# Altium PCB PCB_Tapa.PcbDoc
Units mil, origin at the board's own origin, x right, y up, seen from the top; angles counter-clockwise.
Board outline 2283.46 x 2283.46 mil, 2 copper layers (Top Layer, Bottom Layer), stack 65.792 mil thick; 56 components, 45 nets, 167 pads, 17 vias.
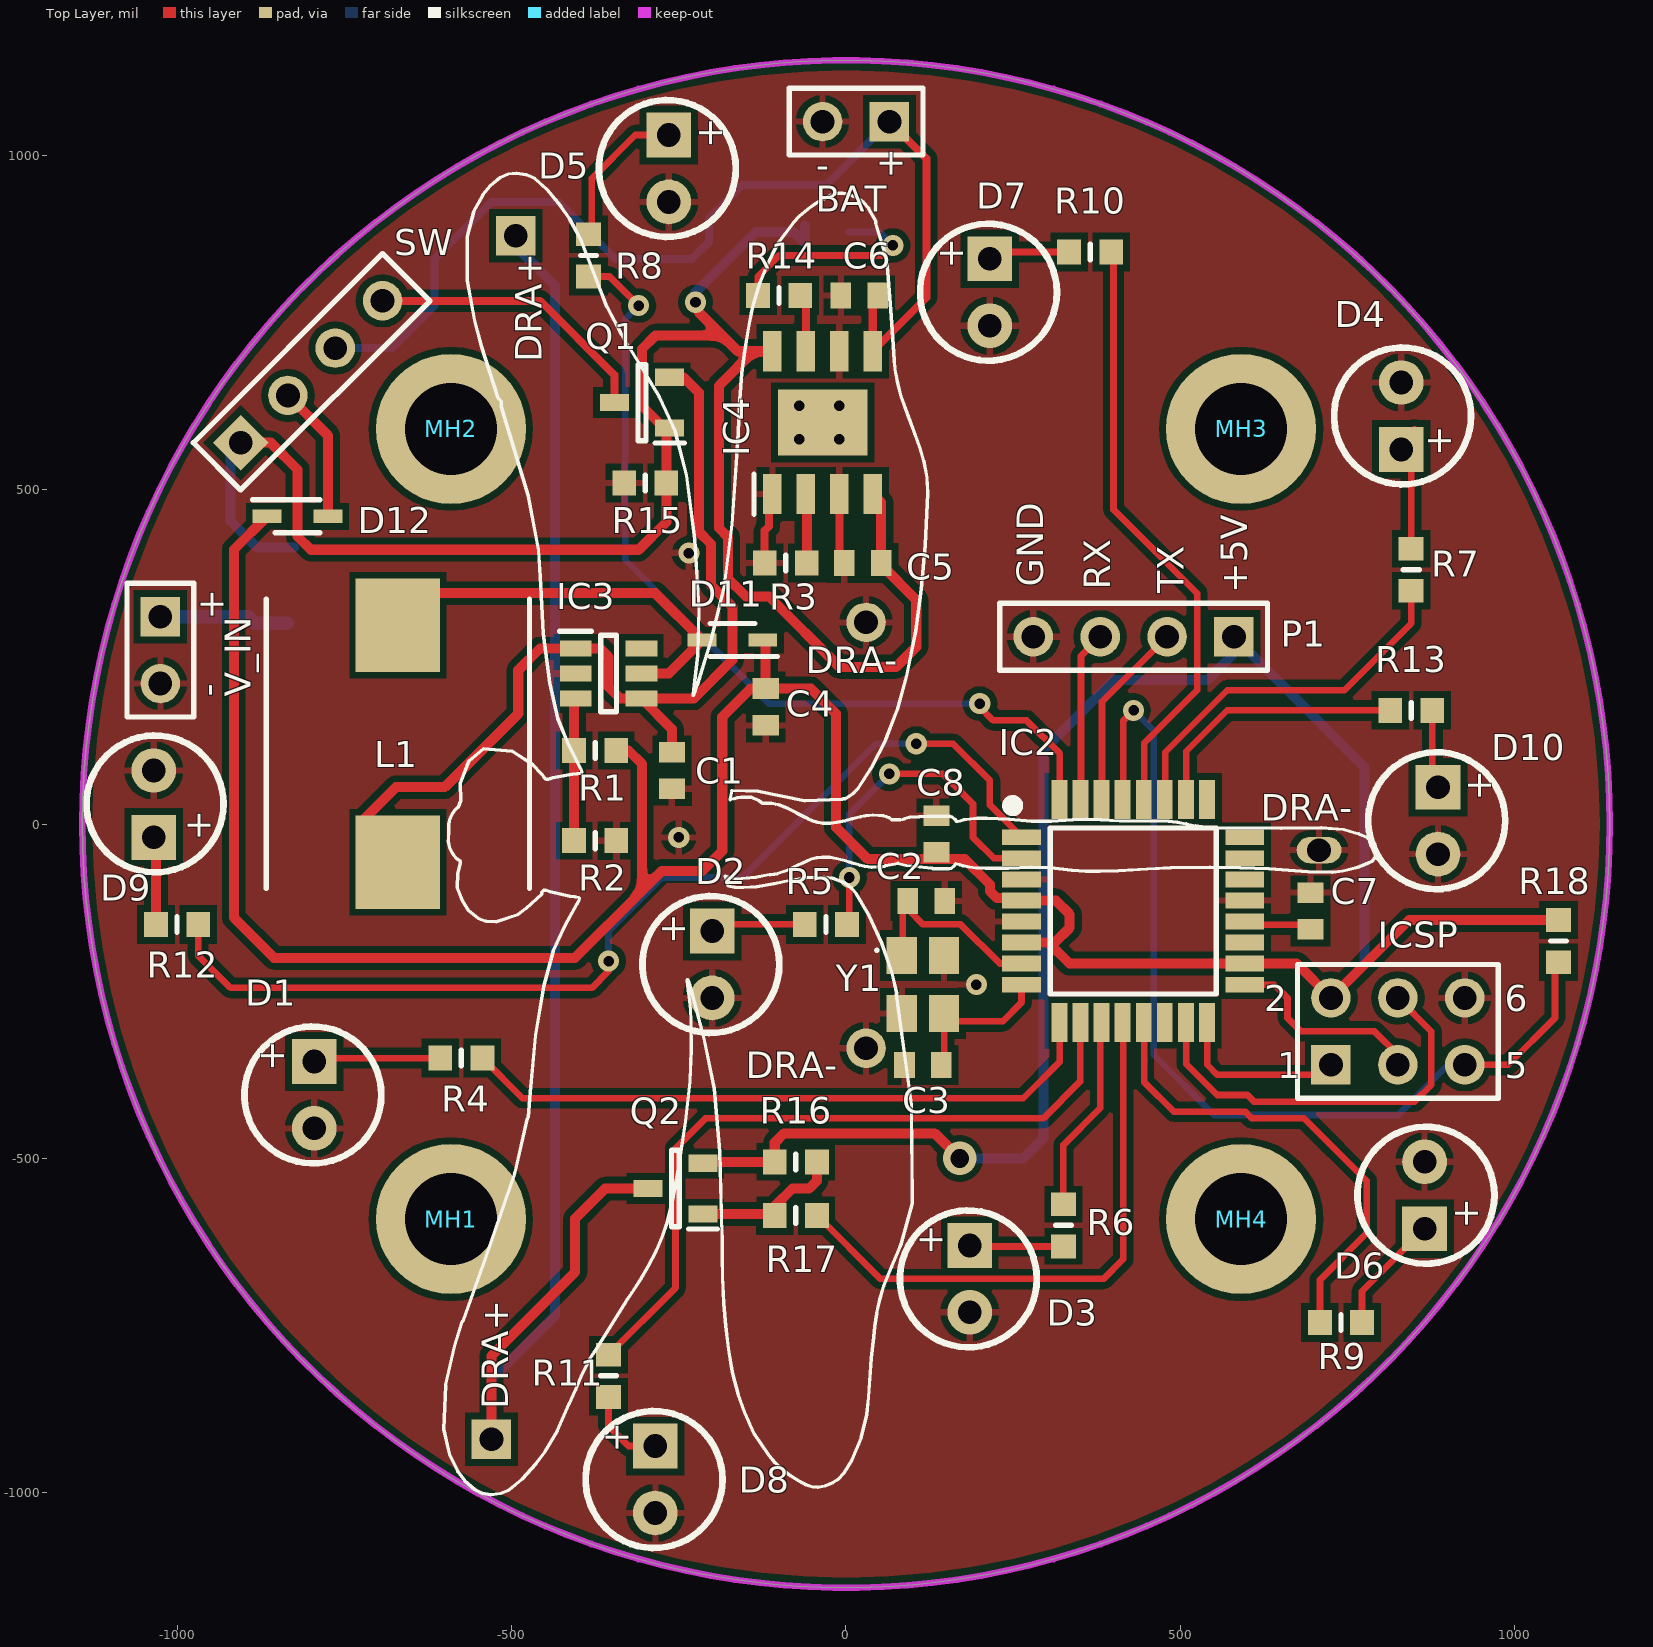
[diagram p0: Top Layer view]
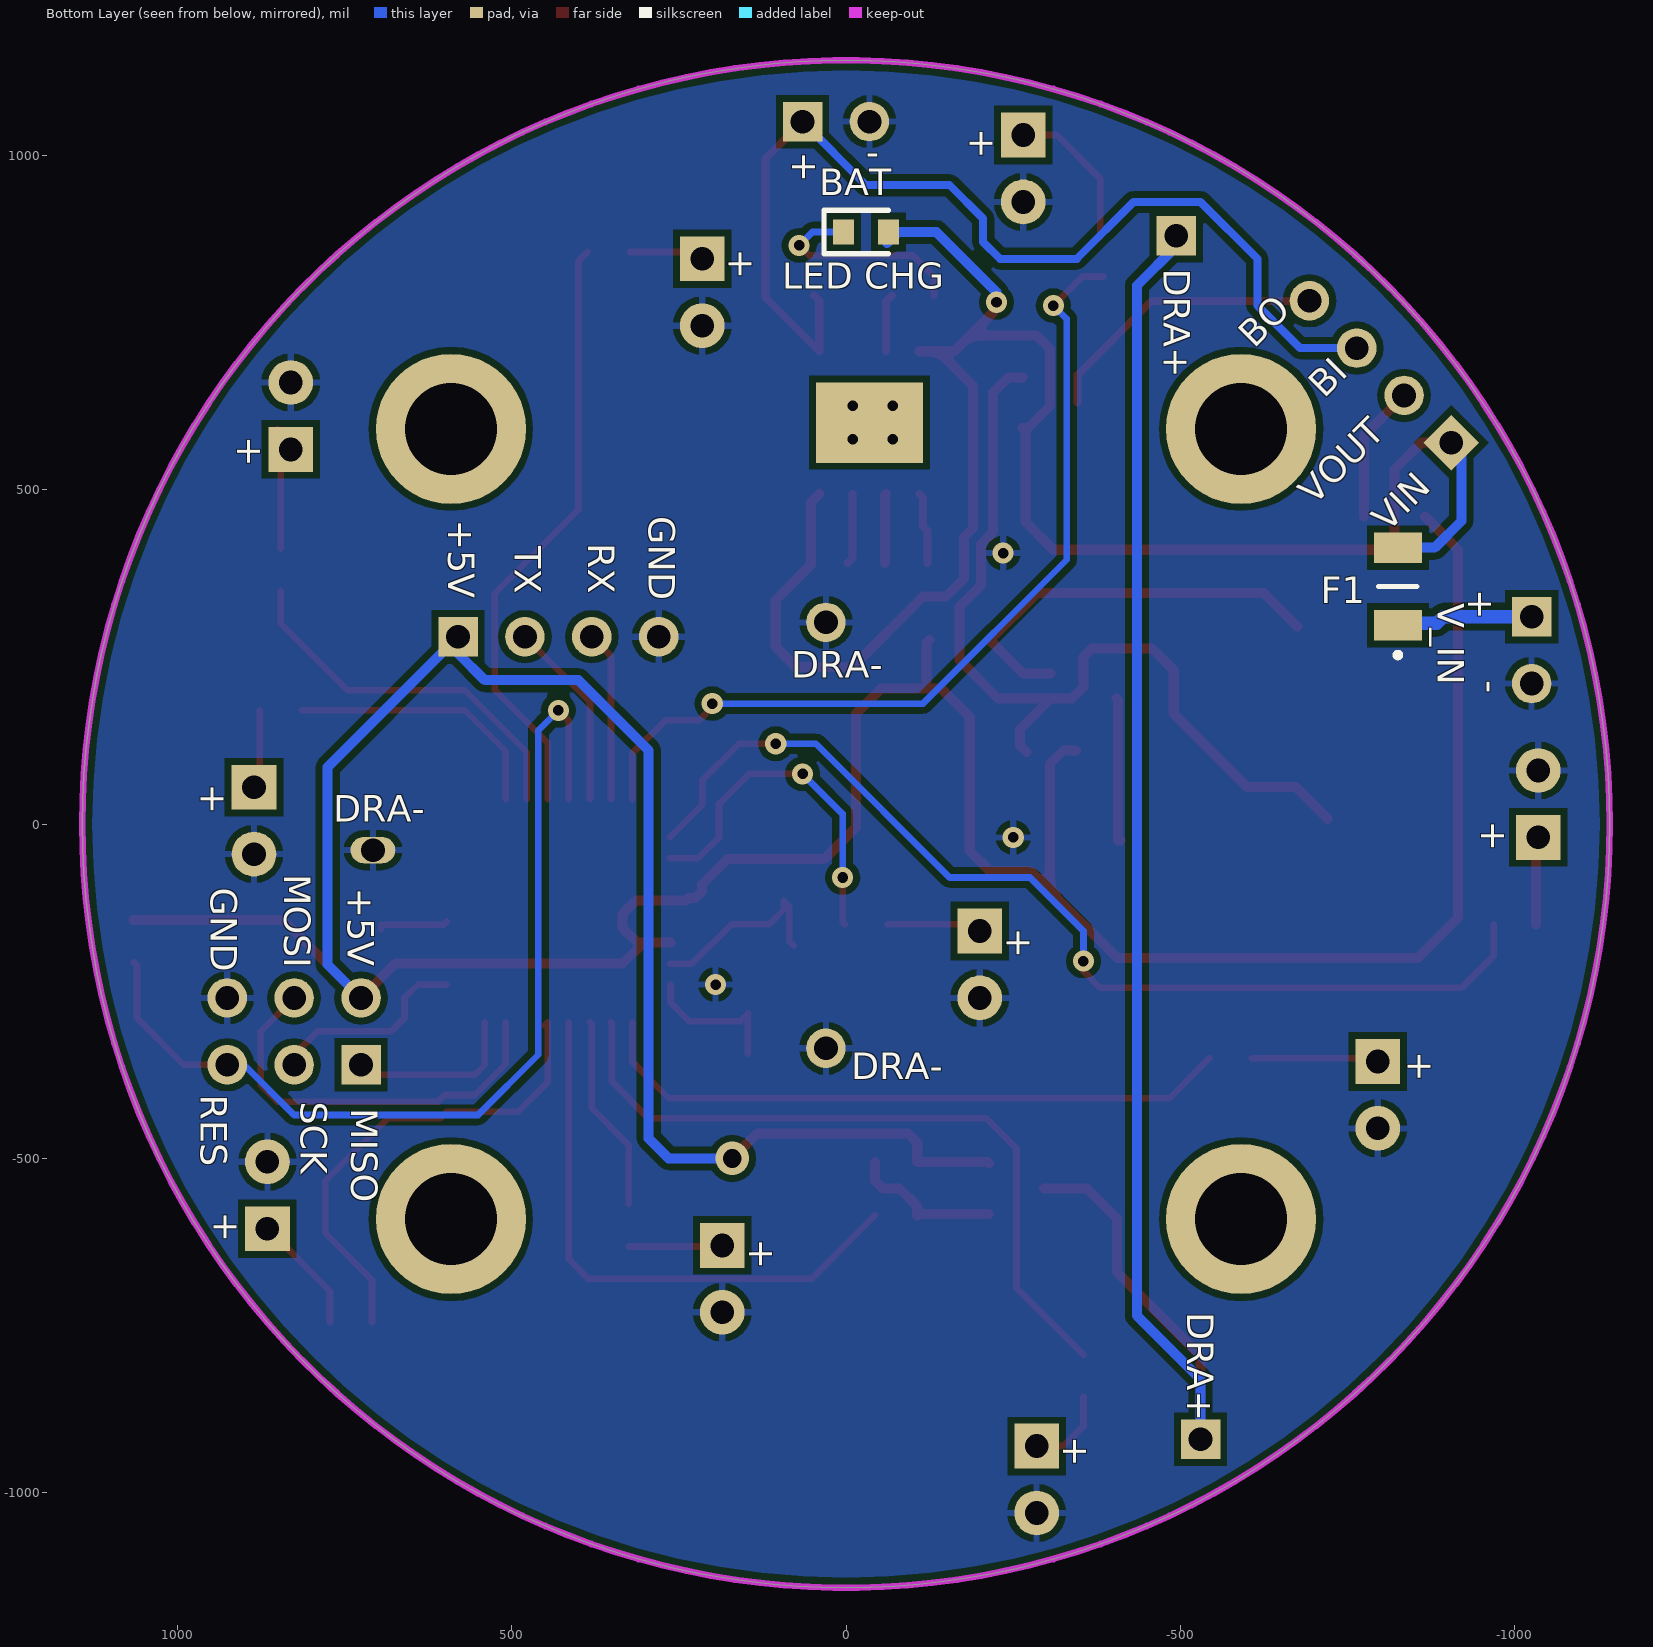
[diagram p1: Bottom Layer view, seen from below]
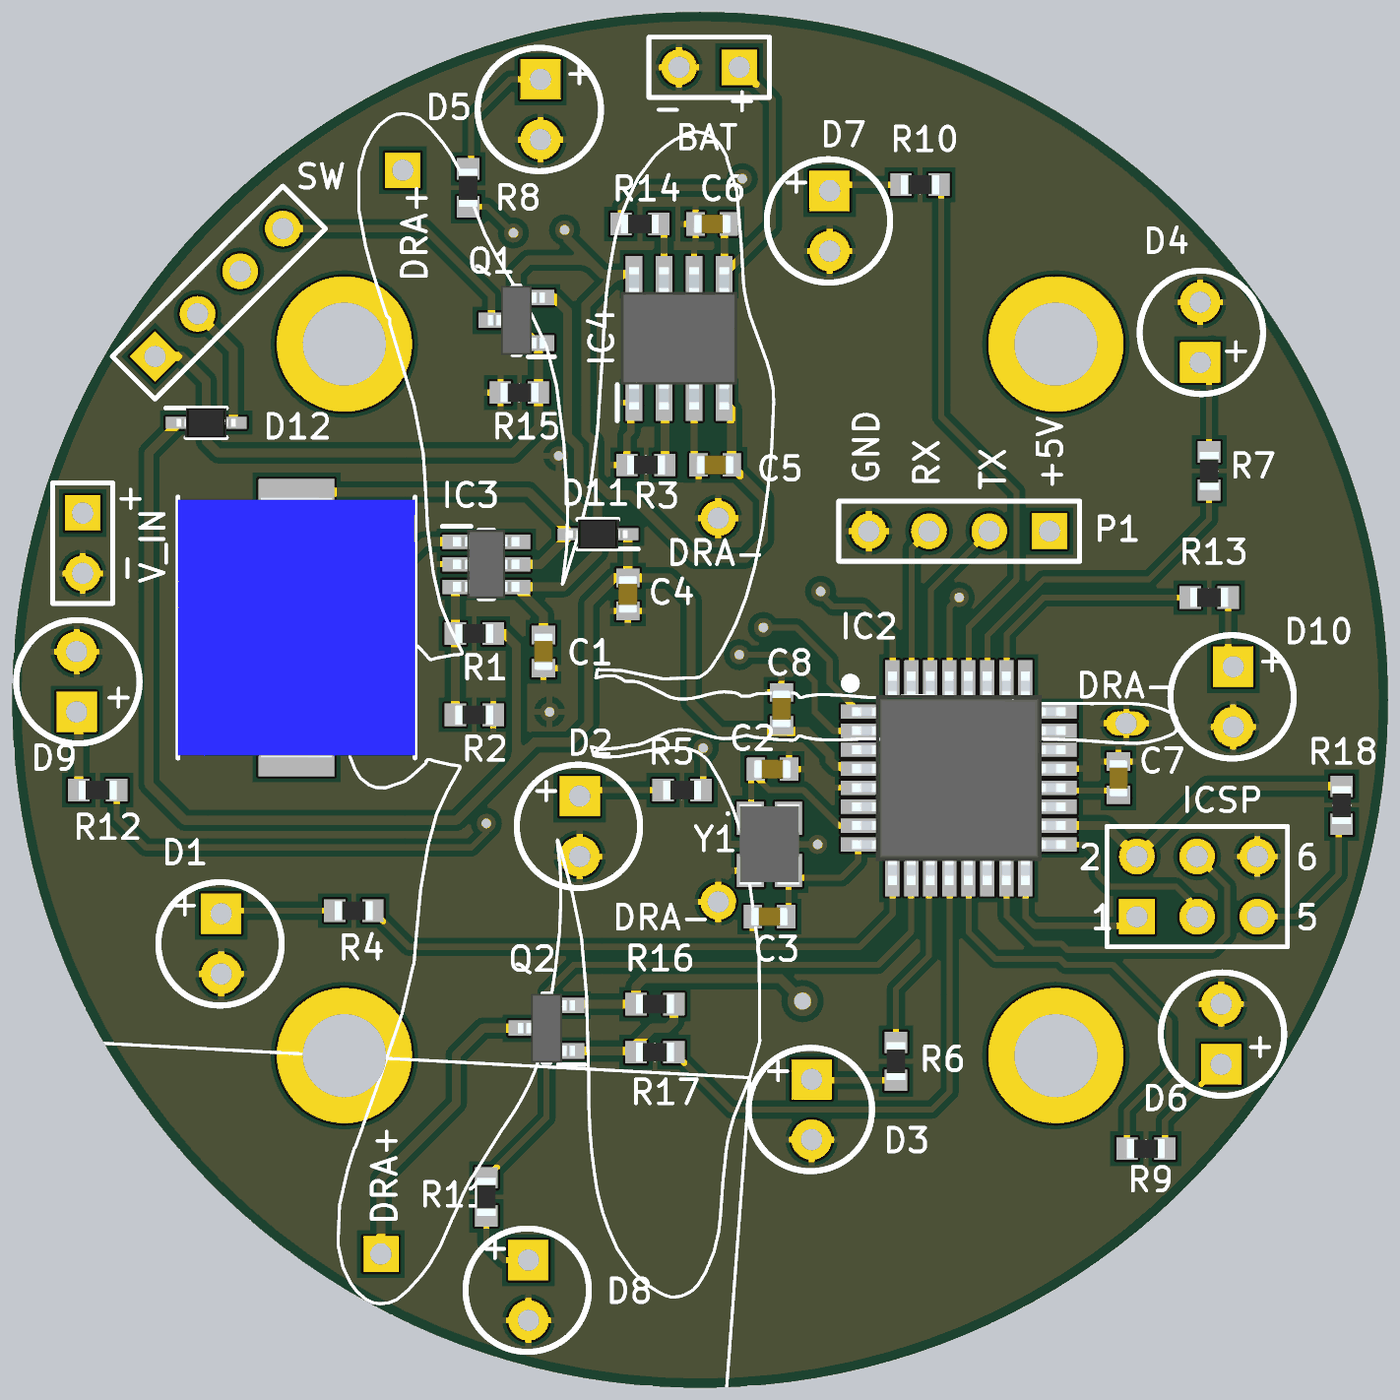
[diagram p2: 3D render of the assembled board from above, using the file's embedded part models]

## Layer stack, top to bottom
Top Solder: solder mask 0.4, Solder Resist, Dk 3.5
Top Layer: signal copper 1.4
Dielectric 1: dielectric 62.9921, FR-4, Dk 4.8
Bottom Layer: signal copper 1.4
Bottom Solder: solder mask 0.4, Solder Resist, Dk 3.5

## Board outline
0,-1141.73 cw(c0,0) -1141.73,0 cw(c0,0) 0,1141.73 cw(c0,0) 1141.73,0 cw(c0,0)

## Design rules (kind name [scope] priority, off if disabled: settings)
Clearance [All] p1: gap=10 except(5: SMDPad-SMDPad)
ComponentClearance [All] p1: gap=10 collisioncheckmode=3 verticalgap=10 showdistances=TRUE
PolygonConnect [All] p1: connectstyle=Relief reliefconductorwidth=10 reliefentries=4 polygonreliefangle="90 Angle" airgapwidth=10
RoutingVias [All] p1: holewidth=15.75 width=31.5 viastyle="Through Hole" minholewidth=11.81 minwidth=19.68 maxholewidth=28 maxwidth=50
SolderMaskExpansion [All] p1: expansion=4
Width [All] p1: maxlimit=30 minlimit=10 preferedwidth=10
29 further rules are at their usual default settings.

## Classes and differential pairs
component class Sheet8: BAT C1 C2 C3 C4 C5 C6 C7 C8 D11 D12 F1 IC2 IC3 IC4 ICSP L1 "LED CHG" P1 Q1 R1 R2 R3 R14 R15 R18 SW V_IN
component class Sheet7: D1 D2 D3 D4 D5 D6 D7 D8 D9 D10 MH1 MH2 MH3 MH4 Q2 R4 R5 R6 R7 R8 R9 R10 R11 R12 R13 R16 R17

## Components (designator, comment, footprint, x,y, rotation, side; value= is the part's Value field where it differs from the comment)
BAT "Battery" HDR1X2 65,1050 r180 top
C1 "22uF" CAPC1608X90N -260,80 r90 top
C2 "22pF" CAPC1608X90N 120,-115 r0 top
C3 "22pF" CAPC1608X90N 115,-360 r0 top
C4 "22uF" CAPC1608X90N -120,175 r90 top
C5 "10uF" CAPC1608X90N 25,390 r0 top
C6 "10uF" CAPC1608X90N 20,790 r0 top
C7 "100nF" CAPC1608X90N 694.33,-130 r90 top
C8 "1uF" CAPC1608X90N 135,-15 r90 top
D1 "LED GREAN" "LED 5mm" -795,-355 r0 top
D2 "LED GREAN" "LED 5mm" -200,-160 r0 top
D3 "LED GREAN" "LED 5mm" 185,-630 r0 top
D4 "LED GREAN" "LED 5mm" 830,560 r180 top
D5 "LED GREAN" "LED 5mm" -265,1030 r0 top
D6 "LED GREAN" "LED 5mm" 865,-605 r180 top
D7 "LED GREAN" "LED 5mm" 215,845 r0 top
D8 "LED GREAN" "LED 5mm" -285,-930 r0 top
D9 "LED GREAN" "LED 5mm" -1035,-20 r180 top
D10 "LED GREAN" "LED 5mm" 885,55 r0 top
D11 "1PS76SB10,115" SOD2512X110N -169.72,275 r180 top
D12 "1PS76SB10,115" SOD2512X110N -820,460 r0 top
F1 "1206L200" 1206L05015YR -825,355 r90 bottom
IC2 "ATMEGA328PB-AN" QFP80P900X900X120-32N 429.33,-130 r0 top
IC3 "MT3608" SOT95P280X145-6N -355,225 r0 top
IC4 "TC4056A" SOIC127P600X175-9N -35,600 r90 top
ICSP "Header 3X2" HDR2X3 725,-360 r0 top
L1 "SRP1038CC-220M" INDPM110100X400N -670,120 r90 top
"LED CHG" "LTST-C191TBKT-5A" LEDC1608X60N -30,885 r180 bottom
MH1 "MOUNTING HOLE" MH#1 -605,-575 r0 top
MH2 "MOUNTING HOLE" MH#2 -610,465 r0 top
MH3 "MOUNTING HOLE" MH#3 560,540 r0 top
MH4 "MOUNTING HOLE" MH#4 695,-710 r0 top
P1 "Header 4" HDR1X4 580,280 r180 top
Q1 "DMP3125L-7" SOT96P240X110-3N -305,630 r180 top
Q2 "DMP3125L-7" SOT96P240X110-3N -255,-545 r180 top
R1 "33K" RESC1608X55N -375,110 r0 top
R2 "4.7K" RESC1608X55N -375,-25 r180 top
R3 "10K" RESC1608X55N -90,390 r180 top
R4 "1K" RESC1608X55N -575,-350 r0 top
R5 "1K" RESC1608X55N -30,-150 r0 top
R6 "1K" RESC1608X55N 325,-600 r90 top
R7 "1K" RESC1608X55N 845,380 r270 top
R8 "1K" RESC1608X55N -385,850 r270 top
R9 "1K" RESC1608X55N 740,-745 r180 top
R10 "1K" RESC1608X55N 365,855 r0 top
R11 "1K" RESC1608X55N -355,-825 r90 top
R12 "1K" RESC1608X55N -1000,-150 r0 top
R13 "1K" RESC1608X55N 845,170 r180 top
R14 "1K" RESC1608X55N -100,790 r180 top
R15 "33K" RESC1608X55N -300,510 r180 top
R16 "100k" RESC1608X55N -75,-505 r180 top
R17 "1K" RESC1608X55N -75,-585 r180 top
R18 "10K" RESC1608X55N 1065,-175 r90 top
SW "SW 2P2T" HDR1X4 -905,570 r45 top
V_IN "Type C female connector" HDR1X2 -1025,310 r270 top
Y1 "TSX-3225_16.0000MF18X-AC0" TSX3225160000MF18XAC0 115,-240 r270 top

## Footprints (in the part's own frame and the unit in brackets; to place one, negate y for a bottom-side part, rotate by r counter-clockwise, add the part's x,y. Pads: shape width x height; smd on the part's side, far side on the other; paste and mask are expansions set on the pad)
1206L05015YR [mm]
  rect 1.16x1.82 smd: 1(-1.475,0) 2(1.475,0)
  silkscreen extent -2.7,-0.72 0,0.72, body extent -1.6,-0.83 1.6,0.83, height 1.6
CAPC1608X90N [mm]
  rect 0.78x0.99 smd: 1(-0.7,0) 2(0.7,0)
  body extent -0.8,-0.41 0.8,0.41, height 0.9
HDR1X2 [mm] "Connector; Header; 2 Position"
  rect 1.5x1.5 hole 0.9: 1(0,0)
  round 1.5 hole 0.9: 2(2.54,0)
  silkscreen extent -1.27,-1.27 3.81,1.27
HDR1X4 [mm] "Connector; Header; 4 Position"
  rect 1.5x1.5 hole 0.9: 1(0,0)
  round 1.5 hole 0.9: 2(2.54,0) 3(5.08,0) 4(7.62,0)
  silkscreen extent -1.27,-1.27 8.89,1.27
HDR2X3 [mm] "Connector; Header; 3x2 Position"
  rect 1.5x1.5 hole 0.9: 1(0,0)
  round 1.5 hole 0.9: 2(0,2.54) 3(2.54,0) 4(2.54,2.54) 5(5.08,0) 6(5.08,2.54)
  silkscreen extent -1.27,-1.27 6.35,3.81
INDPM110100X400N [mm]
  rect 3.55x3.2 smd: 1(-4.5,0) 2(4.5,0)
  silkscreen extent -5.5,-5 5.5,5, body extent -5.5,-5 5.5,5, height 4
"LED 5mm" [mm]
  rect 1.7x1.7 hole 0.9: 1(0,0)
  round 1.7 hole 0.9: 2(0,-2.54)
  silkscreen extent -2.65,-3.87 2.55,1.33
LEDC1608X60N [mm]
  rect 0.8x0.95 smd: 1(-0.85,0) 2(0.85,0)
  silkscreen extent -1.6,-0.82 0.85,0.82
MH#1 [mm]
  round 5.7 hole 3.5: ""(0.367,-0.395)
MH#2 [mm]
  round 5.7 hole 3.5: ""(0.494,3.189)
MH#3 [mm]
  round 5.7 hole 3.5: ""(0.776,1.284)
MH#4 [mm]
  round 5.7 hole 3.5: ""(-2.653,3.034)
QFP80P900X900X120-32N [mm]
  rect 1.475x0.6 smd: 1(-4.238,2.8) 2(-4.238,2) 3(-4.238,1.2) 4(-4.238,0.4) 5(-4.238,-0.4) 6(-4.238,-1.2) 7(-4.238,-2) 8(-4.238,-2.8) 17(4.238,-2.8) 18(4.238,-2) 19(4.238,-1.2) 20(4.238,-0.4) 21(4.238,0.4) 22(4.238,1.2) 23(4.238,2) 24(4.238,2.8)
  rect 0.6x1.475 smd: 9(-2.8,-4.238) 10(-2,-4.238) 11(-1.2,-4.238) 12(-0.4,-4.238) 13(0.4,-4.238) 14(1.2,-4.238) 15(2,-4.238) 16(2.8,-4.238) 25(2.8,4.238) 26(2,4.238) 27(1.2,4.238) 28(0.4,4.238) 29(-0.4,4.238) 30(-1.2,4.238) 31(-2,4.238) 32(-2.8,4.238)
  silkscreen extent -4.77,-3.15 3.15,4.2, body extent -4.5,-4.5 4.5,4.5, height 1.2
RESC1608X55N [mm]
  rect 0.9x0.95 smd: 1(-0.8,0) 2(0.8,0)
  silkscreen extent 0,-0.3 0,0.3, body extent -0.8,-0.4 0.8,0.4, height 0.55
SOD2512X110N [mm]
  rect 1.1x0.5 smd: 1(-1.15,0) 2(1.15,0)
  silkscreen extent -1.7,-0.63 0.85,0.63, body extent -1.24,-0.62 1.24,0.63, height 0.93
SOIC127P600X175-9N [mm]
  rect 1.525x0.7 smd: 1(-2.712,1.905) 2(-2.712,0.635) 3(-2.712,-0.635) 4(-2.712,-1.905) 5(2.712,-1.905) 6(2.712,-0.635) 7(2.712,0.635) 8(2.712,1.905)
  rect 2.513x3.402 smd: 9(0,0)
  silkscreen extent -3.47,2.61 -1.95,2.61, body extent -3,-2.45 3,2.45, height 1.75
SOT95P280X145-6N [mm]
  rect 1.2x0.6 smd: 1(-1.25,0.95) 2(-1.25,0) 3(-1.25,-0.95) 4(1.25,-0.95) 5(1.25,0) 6(1.25,0.95)
  silkscreen extent -1.85,-1.45 0.3,1.6, body extent -1.4,-1.45 1.4,1.45, height 1.45
SOT96P240X110-3N [mm]
  rect 1.1x0.65 smd: 1(-1.05,0.96) 2(-1.05,-0.96) 3(1.05,0)
  silkscreen extent -1.6,-1.45 0.15,1.54, body extent -1.2,-1.45 1.2,1.45, height 1.1
TSX3225160000MF18XAC0 [mm]
  rect 1.4x1.15 smd: 1(-1.1,-0.8) 2(1.1,-0.8) 3(1.1,0.8) 4(-1.1,0.8)
  silkscreen extent -1.35,-1.8 -1.25,-1.7, body extent -1.69,-1.26 1.69,1.26, height 0.7

## Part data
BAT: library part "Header 2", "Li-Po battery 400 mAh"
C1 C2 C3 C4 C5 C6 C7 C8: library part 06035C105KAT2A, "Capacitor"
D1 D2 D3 D4 D5 D6 D7 D8 D9 D10: library part LED1, "Typical GREAN LED"
D11 D12: "Schottky Diode"
F1: "Resettable Fuse"
IC2 IC3 IC4: "Integrated Circuit"
ICSP: "Header, 3-Pin, Dual row"
L1: "Inductor"
"LED CHG": "LED"
P1: "Header, 4-Pin"
Q1 Q2: "MOSFET (P-Channel)"
R1 R2 R3 R4 R5 R6 R7 R8 R9 R10 R11 R12 R13 R14 R15 R16 R17 R18: library part KTR03EZPF1501, "Resistor"
SW: library part "Header 4", "SWITCH, 2 POLES 2 THROWS"
V_IN: library part "Header 2", "USB Type C 2 Pins Connector Jack Female Type-C 3A 30V Oval with Wire Current Fast Charging Jacker Port USB-C Charger Plug Socket"
Y1: "Crystal or Oscillator"

## Free pads (board coordinates)
  rect 59.06x59.06 hole 35.43: 1(-530,-920) 1(-493.58,879.21)
  round 59.06 hole 35.43: 2(30.04,-335.35) 2(30.04,301.46)
  oval 66.93x39.37 hole 35.43: 2(707.2,-39.09)
  rect 160x120 smd far side: 3(-35,600)

## Via types
v1: diameter 31.5, hole 15.75, Top Layer to Bottom Layer, tented both sides, 12 vias
v2: diameter 31.5, hole 15.75, Top Layer to Bottom Layer, 4 vias
v3: diameter 50, hole 28, Top Layer to Bottom Layer, tented both sides, 1 vias

## Nets (pads, with @x,y where several pads share a name; then routed paths per layer and width w, separated by ;. In a path a pad name is that pad's centre, name@x,y a point inside that pad or via, vN(x,y) a via of type N, cw(c..) or ccw(c..) an arc to the next point about the centre after c; other vN are vias at no path point)
+5V: C4.2 C8.1 D11.1 D12.1 IC2.4 IC2.6 IC2.18 ICSP.2 P1.1 Q2.2 R1.2 R16.2 R18.2 | length 5845.4
  Top Layer w15: D12.1 -915,410.28 -915,-140 -855,-200 -405,-200 -305,-100 ; R1.2 -325,110 -305,90 -305,-100 ; Q2.2 -211.46,-505 R16.2 -106.5,-476.5 -92.5,-462.5 132.5,-462.5 v3(170,-500) ; D11.1 -120,270.55 C4.2 ; IC2.4@238.58,-114.25 IC2.4@239.25,-114.25 ; IC2.6 302.5,-177.24 ; R18.2 841.5,-143.5 ICSP.2 673.74,-208.74 IC2.18 334,-208.74 302.5,-177.24 ; -305,-100 -275,-70 -214.77,-70 -185,-40.23 -185,160 -142.44,202.56 C4.2 ; C4.2 -52.56,202.56 -15,165 -15,-5 32.56,-52.56 177.56,-52.56 215.28,-90.28 215.28,-100.48 225.53,-110.73 235.73,-110.73 IC2.4@239.25,-114.25 ; IC2.4@239.25,-114.25 IC2.4 313.58,-114.25 334.33,-135 334.33,-155 312.09,-177.24 302.5,-177.24
  Bottom Layer w15: v3(170,-500) 265,-500 295,-470 295,110 400,215 540,215 580,255 P1.1 775,85 775,-210 ICSP.2
C_LIBELULA: IC2.12 R17.1 | length 863.1
  Top Layer w10: R17.1 51.5,-680 385,-680 414.25,-650.75 IC2.12@414.25,-296.85
GND: BAT.2 C1.1 C2.2 C3.1 C4.1 C5.1 C6.1 C7.2 C8.2 D1.2 D2.2 D3.2 D4.2 D5.2 D6.2 D7.2 D8.2 D9.2 D10.2 IC2.3 IC2.5 IC2.21 IC3.2 IC4.1 IC4.3 IC4.6 ICSP.6 P1.4 pad.2 R2.1 R3.2 R15.2 V_IN.2 Y1.2 Y1.4 | length 214.3
  Top Layer w12: R3.2 -121.5,438.5 -115,445 -115,488.23 IC4.1 ; IC4.3 -10,397.44 C5.1
  other v1: 195,-240 -250,-20 -235,405
LUCI_1: IC2.9 R4.2 | length 969.2
  Top Layer w10: R4.2 -483.5,-410 265,-410 319.76,-355.24 IC2.9@319.76,-296.85
LUCI_2: IC2.2 R5.2 | length 521
  Top Layer w10: R5.2 5,-146.5 v1(5,-80) ; v1(65,75) 145,75 190,30 190,-20 221.26,-51.26 IC2.2 IC2.2@263.15,-51.26
  Bottom Layer w10: v1@5,-70 5,15 v1(65,75)
LUCI_3: IC2.11 R6.2 | length 295.6
  Top Layer w10: R6.2 325,-480 380,-425 380,-299.61 IC2.11@382.76,-296.85
LUCI_4: IC2.27 R7.2 | length 566.5
  Top Layer w10: IC2.27@477.24,36.85 477.24,107.24 570,200 745,200 845,300 R7.2
LUCI_5: IC2.32 R8.2 | length 1322.4
  Top Layer w10: R8.2 -353.5,818.5 v1(-310,775) ; v1(200,180) 200,175 220,155 270,155 319.76,105.24 IC2.32@319.76,36.85
  Bottom Layer w10: v1(-310,775) -330,755 -330,395 -115,180 v1(200,180)
LUCI_6: IC2.13 R9.2 | length 729.4
  Top Layer w10: IC2.13@450,-301.1 445.75,-296.85 445.75,-385.75 490,-430 596.72,-430 606.72,-440 685,-440 778.5,-533.5 778.5,-611.5 708.5,-681.5 R9.2
LUCI_7: IC2.28 R10.2 | length 908.3
  Top Layer w10: R10.2@386.5,855 400,841.5 400,470 525,345 525,200 445.75,120.75 IC2.28@445.75,36.85
LUCI_8: IC2.10 R11.2 | length 1085
  Top Layer w10: R11.2 -255,-693.5 -255,-485 -210,-440 295,-440 350,-385 350,-298.11 IC2.10@351.26,-296.85
LUCI_9: IC2.1 R12.2 | length 1563.9
  Top Layer w10: R12.2 -968.5,-196.5 -920,-245 -380,-245 -355,-220 v1(-355,-205) ; v1(105,120) 160,120 215,65 215,28.39 IC2.1@263.15,-19.76
  Bottom Layer w10: v1(-355,-205) -355,-160 -275,-80 -155,-80 45,120 v1(105,120)
LUCI_10: IC2.26 R13.2 | length 402
  Top Layer w10: IC2.26@508.74,36.85 508.74,108.74 570,170 R13.2
MISO: IC2.16 ICSP.1 | length 260.7
  Top Layer w10: IC2.16@540.24,-296.85 540.24,-359.76 540,-360 555,-375 710,-375 ICSP.1
MOSI: IC2.15 ICSP.4 | length 612.5
  Top Layer w10: IC2.15@508.74,-296.85 508.74,-358.74 555,-405 600,-405 610,-415 850,-415 875,-390 875,-310 ICSP.4
NetC7_1: C7.1 IC2.20 | length 107.2
  Top Layer w10: IC2.20@596.85,-145.75 601.54,-150.43 695,-150.43 C7.1@695,-157.56
NetD1_1: D1.1 R4.1 | length 190.6
  Top Layer w10: D1.1 -790,-350 R4.1
NetD2_1: D2.1 R5.1 | length 142.6
  Top Layer w10: D2.1 -190,-150 R5.1
NetD3_1: D3.1 R6.1 | length 140.6
  Top Layer w10: D3.1 186.5,-631.5 R6.1
NetD4_1: D4.1 R7.1 | length 203.2
  Top Layer w10: D4.1 845,545 R7.1 ; D4.1@850,541.5 D4.1@850,590
NetD5_1: D5.1 R8.1 | length 228.9
  Top Layer w10: R8.1@-380,877.99 -380,965 -315,1030 D5.1
NetD6_1: D6.1 R9.1 | length 178.7
  Top Layer w10: R9.1 771.5,-698.5 D6.1
NetD7_1: D7.1 R10.1 | length 110.6
  Top Layer w10: D7.1@215,850 220,855 R10.1@323.5,855
NetD8_1: D8.1 R11.1 | length 125.9
  Top Layer w10: R11.1 -355,-900 -325,-930 D8.1
NetD9_1: D9.1 R12.1 | length 131.5
  Top Layer w15: D9.1 -1031.5,-23.5 R12.1
NetD10_1: D10.1 R13.1 | length 118.5
  Top Layer w10: R13.1 876.5,63.5 D10.1
NetD11_2: D11.2 IC3.5 L1.2 | length 621.2
  Top Layer w15: L1.2@-675,295 -625,345 -285,345 D11.2 -265,225 IC3.5
NetF1_1: F1.1 V_IN.1 | length 194.1
  Bottom Layer w20: V_IN.1 -893.07,310 -883.07,300 F1.1@-835,300
NetIC3_3: IC3.3 R1.1 R2.2 | length 213.6
  Top Layer w15: R2.2@-410,-25 R2.2@-410,-24.91 ; R2.2 R1.1 -406.5,185.31 IC3.3
NetIC4_2: IC4.2 R3.1 | length 103.8
  Top Layer w15: IC4.2 -58.5,491.73 R3.1
NetIC4_7: IC4.7 R14.1 | length 86.8
  Top Layer w12: R14.1 -60,781.5 IC4.7
"NetLED CHG_1": "LED CHG.1" R14.2 | length 334.1
  Top Layer w10: R14.2 -131.5,818.5 -100,850 55,850 v1(70,865) v1@70,875
  Bottom Layer w10: 3.46,885 50,885 v1(70,865)
NetQ2_1: Q2.1 R16.1 R17.2 | length 228.8
  Top Layer w15: Q2.1 -108.7,-582.8 R17.2 -106.5,-571.5 -80,-545 -55,-545 -43.5,-533.5 R16.1
RESET: IC2.29 ICSP.5 R18.1 | length 1450
  Top Layer w10: IC2.29@414.25,36.85 414.25,154.25 v1(430,170) ; ICSP.5 990,-360 1060,-290 1060,-211.5 R18.1
  Bottom Layer w10: v1(430,170) 460,140 460,-345 550,-435 825,-435 900,-360 ICSP.5
RX: IC2.31 P1.3 | length 255.1
  Top Layer w10: IC2.31@351.26,36.85 351.26,251.26 P1.3
SCK: IC2.17 ICSP.3 | length 304.1
  Top Layer w10: IC2.17@596.85,-240.24 640.24,-240.24 660,-260 660,-290 680,-310 790,-310 825,-345 ICSP.3
TX: IC2.30 P1.2 | length 283.4
  Top Layer w10: IC2.30@382.76,36.85 382.76,182.76 P1.2
V_BAT: BAT.1 C6.2 IC4.5 SW.3 | length 1586.3
  Top Layer w12: C6.2 40,782.44 IC4.5 120,786.77 120,995 BAT.1
  Bottom Layer w12: SW.3 -678.58,711.42 -615,775 -615,845 -530,930 -430,930 -345,845 -230,845 -205,870 -205,905 -155,955 -30,955 BAT.1
V_BAT_MOSFET: C1.2 IC3.1 IC3.4 L1.1 Q1.2 | length 1351.6
  Top Layer w15: L1.1@-720,7.83 -672.83,55 -600,55 -490,165 -490,230 -457.6,262.4 IC3.1 -367.4,262.4 -355,250 -355,205 -337.6,187.6 IC3.4 ; C1.2@-270,107.56 -260,117.56 -260,141.81 IC3.4 ; Q1.2 -242.8,667.8 -220,645 -220,437.02 -201.75,418.77 -201.75,356.75 -170,325 -170,245 -227.4,187.6 IC3.4
V_BAT_OUT: Q1.3 SW.4 | length 433.8
  Top Layer w12: SW.4 -457.13,782.13 -346.34,671.34 Q1.3
V_IN: "LED CHG.2" C5.2 F1.2 IC4.4 IC4.8 Q1.1 R15.1 SW.1 | length 2778.1
  Top Layer w15: SW.1 -860,570 -820,530 -820,430 -800,410 -310,410 -268.5,451.5 R15.1 -268.5,587.36 Q1.1 -272.2,592.2 -305,625 -305,710 -285,730 -185,730 ; -220,765 -185,730 ; IC4.8 -138.23,706.77 ; IC4.4 52.56,480.67 C5.2 52.56,387.44 105,335 105,265 75,235 -10,235 -115,340 -149.64,340 -176.75,367.11 -176.75,429.13 -190,442.38 -190,655 -138.23,706.77 ; -185,730 -161.77,706.77 -138.23,706.77
  Bottom Layer w15: SW.1 -920,555 -920,453.07 -880,413.07 F1.2 ; v1(-225,780) -225,795 -135,885 -78.07,885 -61.54,868.46 -61.54,895
V_IN_D: D12.2 SW.2 | length 205.4
  Top Layer w15: SW.2 -774.72,581.15 D12.2
V_LIBELULA: pad.1 Q2.3 | length 2371.9
  Top Layer w15: pad.1@-530,-920 -530,-795 -405,-670 -405,-590 -360,-545 Q2.3
  Bottom Layer w15: pad.1@-530,-920 -530,-830 -435,-735 -435,805 -493.58,863.58 pad.1@-493.58,879.21
XTAL1: C2.1 IC2.7 Y1.1 | length 289.3
  Top Layer w10: Y1.1@78.5,-181.69 85,-175.2 85,-123.11 93.11,-115 93.11,-128.11 115,-150 171.21,-150 229.95,-208.74 IC2.7 IC2.7@263.15,-208.74
XTAL2: C3.2 IC2.8 Y1.3 | length 217.8
  Top Layer w10: Y1.3 Y1.3@146.89,-283.7 ; C3.2@146.89,-343.66 Y1.3@146.89,-283.7 ; Y1.3@156.85,-293.66 Y1.3@146.89,-283.7 ; Y1.3@157.52,-295 234.33,-295 262.48,-266.85 IC2.8
pads on no net: IC2.14 IC2.19 IC2.22 IC2.23 IC2.24 IC2.25 IC3.6 IC4.9 MH1. MH2. MH3. MH4.
copper on no net:
  other v2: -70,575 -10,575 -70,625 -10,625

## Polygon pours and split planes (outlines as drawn)
GND on Top Layer "GND_L01_P004" (solid, pour order 4): 0,-1141.73 cw(c0,0) -1141.73,0 cw(c0,0) 0,1141.73 cw(c0,0) 1141.73,0 cw(c0,0)
GND on Bottom Layer "GND_L02_P005" (solid, pour order 5): 0,-1141.73 cw(c0,0) -1141.73,0 cw(c0,0) 0,1141.73 cw(c0,0) 1141.73,0 cw(c0,0)

## Keep-outs
Keep-Out Layer:
  circle w10: c0,0 r1141.73

## Silkscreen, mask and mechanical layers (free items; w line width, h text height)
Top Overlay:
  drawing of 417 lines, arcs and shapes, not listed
  text "+" at -185,1010 h40 r90
  text "-" at -25,995 h40 r180
  text "+" at 85,965 h40 r90
  text "+" at 175,830 h40 r90
  text "DRA+" at -455,690 h40 r90
  text "+" at 905,550 h40 r90
  text "GND" at 295,355 h40 r90
  text "RX" at 395,350 h40 r90
  text "TX" at 505,345 h40 r90
  text "+5V" at 600,345 h40 r90
  text "+" at -930,305 h40 r90
  text "DRA-" at -60,225 h40
  text "-" at -935,190 h40 r90
  text "+" at 965,35 h40 r90
  text "DRA-" at 620,5 h40
  text "+" at -950,-25 h40 r90
  text "+" at -240,-180 h40 r90
  text "+" at -840,-370 h40 r90
  text "DRA-" at -150,-380 h40
  text "+" at 945,-605 h40 r90
  text "+" at 145,-645 h40 r90
  text "DRA+" at -505,-875 h40 r90
  text "+" at -325,-940 h40 r90
Bottom Overlay:
  text "+" at -185,1040 h40 r90
  text "-" at -50,1015 h40 r180
  text "+" at 80,1005 h40 r90
  text "BAT" at 40,940 h40
  text "+" at 175,860 h40 r90
  text "DRA+" at -475,830 h40 r90
  text "BO" at -610,710 h40 r315
  text "BI" at -715,635 h40 r315
  text "+" at 910,580 h40 r90
  text "VOUT" at -700,475 h40 r315
  text "GND" at 295,460 h40 r90
  text "+5V" at 595,455 h40 r90
  text "VIN" at -810,435 h40 r315
  text "RX" at 385,420 h40 r90
  text "TX" at 495,415 h40 r90
  text "V_IN" at -885,330 h40 r90
  text "+" at -930,305 h40 r90
  text "DRA-" at 81.83,218.52 h40
  text "-" at -975,215 h40 r270
  text "+" at 965,60 h40 r90
  text "+" at -950,5 h40 r90
  text "DRA-" at 766.83,3.52 h40
  text "MOSI" at 840,-75 h40 r90
  text "+5V" at 745,-95 h40 r90
  text "GND" at 950,-95 h40 r90
  text "+" at -240,-155 h40 r90
  text "+" at -840,-340 h40 r90
  text "DRA-" at -8.17,-381.48 h40
  text "RES" at 965,-405 h40 r90
  text "SCK" at 815,-415 h40 r90
  text "MISO" at 740,-425 h40 r90
  text "+" at 945,-580 h40 r90
  text "+" at 145,-620 h40 r90
  text "DRA+" at -510,-730 h40 r90
  text "+" at -325,-915 h40 r90
Mechanical 15:
  drawing of 417 lines, arcs and shapes, not listed

## Text inside footprints (layer, text, board x,y; h text height)
ICSP: Top Overlay "6" at 985,-280 h39.37; Top Overlay "5" at 985,-380 h39.37; Top Overlay "2" at 625,-280 h39.37; Top Overlay "1" at 645,-380 h39.37